# Altium PCB JacDacRHTemp_Panel.PcbDoc (part 2 of 2)
Units mm, origin at the board's own origin, x right, y up, seen from the top; angles counter-clockwise.
Board outline 188.07 x 95 mm, 2 copper layers (Top Layer, Bottom Layer); 1 components, 34 nets, 50 pads, 167 vias.
Unrouted connection lines stored in the file: 5.
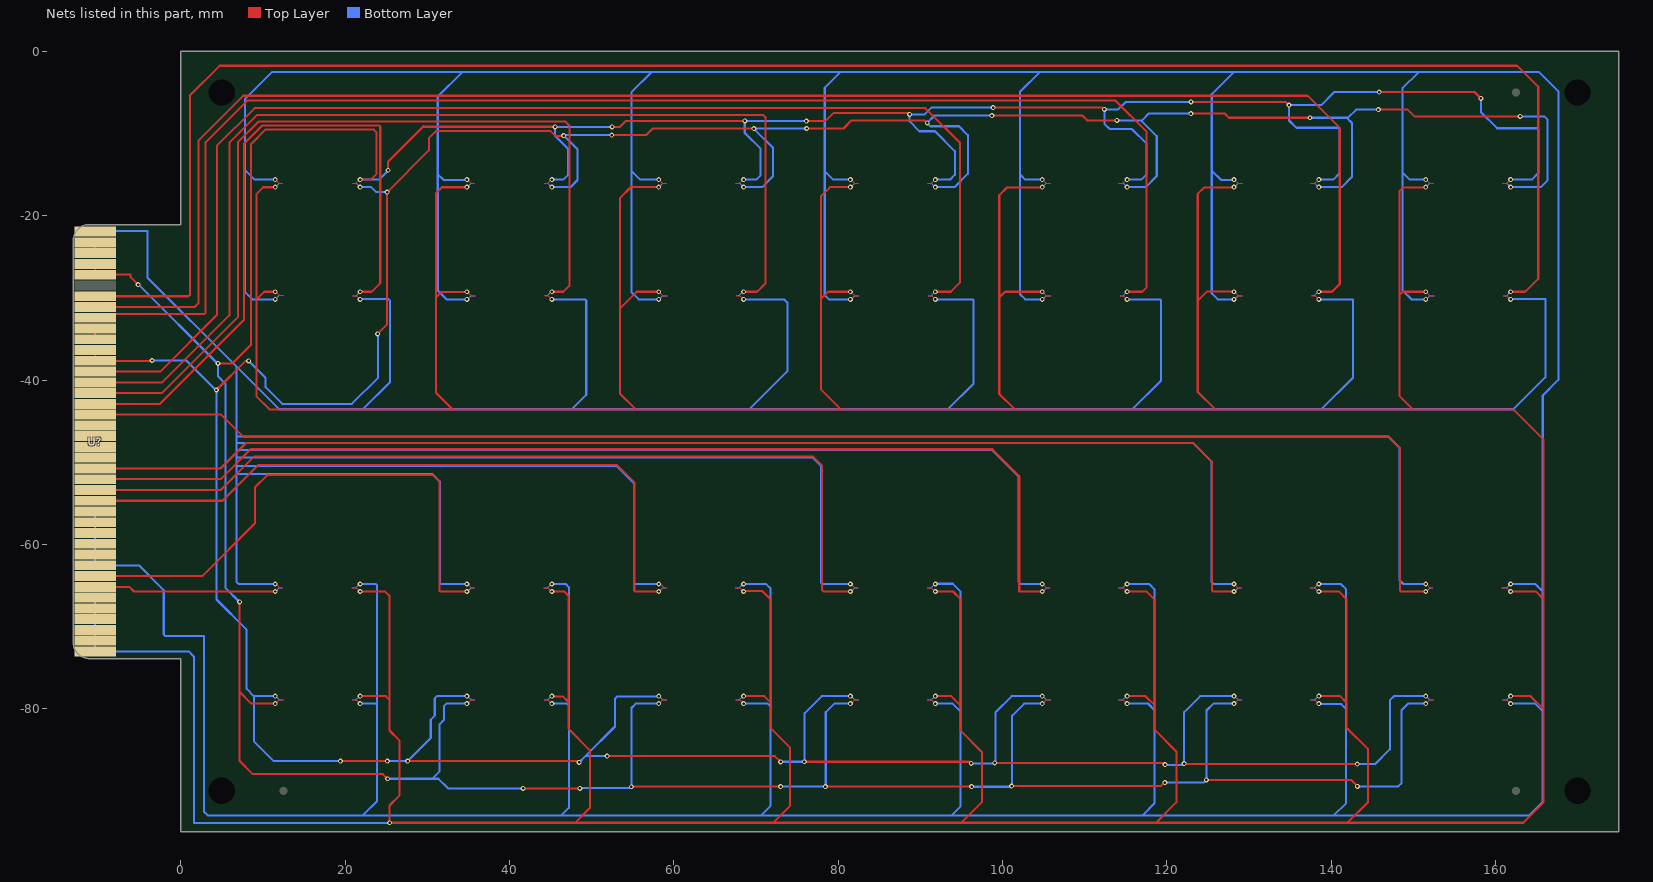
[diagram p2: the nets of this part, all layers, seen from the top]

## Part data
U?: "Microbit edge connector"

## Free pads (board coordinates)
  round 1.524 hole 3.2: 2(5,-90) 2(5,-5) 2(170,-5) 3(170,-90)
  round 1 all layers, no hole mask+1: 4(12.5,-90) 4(162.5,-90) 4(162.5,-5)

## Via types
v1: diameter 0.6, hole 0.3, Top Layer to Bottom Layer, 167 vias

## Nets (pads, with @x,y where several pads share a name; then routed paths per layer and width w, separated by ;. In a path a pad name is that pad's centre, name@x,y a point inside that pad or via, vN(x,y) a via of type N, cw(c..) or ccw(c..) an arc to the next point about the centre after c; other vN are vias at no path point)
3V3: U?.3v3_1 U?.3v3_2 U?.3v3_3 U?.3v3_4 U?.3v3_5 U?.3v3_6 | length 948.2
  Top Layer w0.15: v1@11.565,-15.61 12.021,-16.067 12.413,-16.067 ; 20.892,-78.931 21.351,-78.931 v1@21.809,-79.39 ; v1@34.887,-15.611 35.345,-16.068 35.774,-16.068 ; 44.259,-78.929 44.672,-78.929 v1@45.132,-79.39 ; v1@58.227,-15.611 58.682,-16.066 59.125,-16.066 ; 67.552,-78.93 68.007,-78.93 v1@68.467,-79.39 ; v1(81.511,-15.611) 81.577,-15.611 82.033,-16.066 82.475,-16.066 ; 90.859,-78.931 91.344,-78.931 v1@91.802,-79.39 ; v1@104.893,-15.611 105.352,-16.07 105.839,-16.07 ; 114.161,-78.929 114.683,-78.929 v1@115.143,-79.39 ; v1@128.234,-15.611 128.691,-16.068 129.189,-16.068 ; 137.547,-78.928 138.021,-78.928 v1@138.482,-79.39 ; v1@151.581,-15.611 152.033,-16.063 152.507,-16.063 ; 160.896,-78.929 161.357,-78.929 v1@161.817,-79.39
  Top Layer w0.254: v1(11.5,-15.61) v1@11.565,-15.61 ; v1@21.809,-79.39 v1(21.837,-79.39) ; v1(34.837,-30.176) v1@34.877,-30.176 ; v1@45.116,-64.825 v1(45.174,-64.825) ; v1@45.132,-79.39 v1(45.174,-79.39) ; v1(58.174,-30.176) v1@58.217,-30.176 ; v1(58.174,-15.611) v1@58.227,-15.611 ; v1(81.511,-30.176) v1@81.551,-30.176 ; v1(104.848,-30.176) v1@104.888,-30.176 ; v1(104.848,-15.611) v1@104.893,-15.611 ; v1(128.185,-30.176) v1@128.23,-30.176 ; v1(128.185,-15.611) v1@128.234,-15.611 ; v1(151.522,-30.176) v1@151.574,-30.176 ; v1(151.522,-15.611) v1@151.581,-15.611
  Bottom Layer w0.15: v1@11.539,-30.175 12.001,-29.713 12.491,-29.713 ; 20.839,-65.281 21.331,-65.281 v1@21.787,-64.825 ; v1(34.837,-15.611) v1@34.887,-15.611 ; v1@34.877,-30.176 35.339,-29.714 35.868,-29.714 ; 44.183,-65.277 44.664,-65.277 v1@45.116,-64.825 ; v1@58.217,-30.176 58.678,-29.716 59.229,-29.716 ; 67.511,-65.282 67.994,-65.282 v1@68.451,-64.825 ; v1@81.551,-30.176 82.013,-29.714 82.519,-29.714 ; 90.842,-65.28 91.341,-65.28 v1@91.796,-64.825 ; v1@104.888,-30.176 105.35,-29.714 105.896,-29.714 ; 114.139,-65.277 114.675,-65.277 v1@115.127,-64.825 ; v1@128.23,-30.176 128.689,-29.716 129.193,-29.716 ; 137.485,-65.279 138.014,-65.279 v1@138.468,-64.825 ; v1@151.574,-30.176 152.03,-29.72 152.579,-29.72 ; 160.802,-65.283 161.355,-65.283 v1@161.813,-64.825
  Bottom Layer w0.254: U?.3v3_1@-10.414,-56.001 U?.3v3_2@-10.414,-57.311 U?.3v3_3@-10.414,-58.621 U?.3v3_4@-10.414,-59.931 U?.3v3_5@-10.414,-61.241 U?.3v3_6@-10.414,-62.551 -5.081,-62.551 -2.067,-65.565 -2.067,-70.993 -1.918,-71.142 2.81,-71.142 2.81,-92.516 3.284,-92.99 22.167,-92.99 ; v1(11.5,-15.61) 9.004,-15.61 7.803,-14.409 ; v1@11.539,-30.175 v1(11.5,-30.175) 8.733,-30.175 7.803,-29.245 7.803,-14.409 ; v1@21.787,-64.825 v1(21.837,-64.825) 23.744,-64.825 23.893,-64.973 23.893,-79.51 ; v1(21.837,-79.39) 23.773,-79.39 23.893,-79.51 ; v1(34.837,-30.176) 32.347,-30.176 31.282,-29.111 31.282,-14.944 ; v1(34.837,-15.611) 34.791,-15.657 31.995,-15.657 31.282,-14.944 ; v1(45.174,-79.39) 46.974,-79.39 47.24,-79.656 ; v1(45.174,-64.825) 46.866,-64.825 47.24,-65.199 47.24,-79.656 ; v1(58.174,-30.176) 55.736,-30.176 54.849,-29.289 54.849,-14.542 ; v1(58.174,-15.611) 58.173,-15.612 55.919,-15.612 54.849,-14.542 ; v1@68.451,-64.825 v1(68.511,-64.825) 68.523,-64.836 71.244,-64.836 71.788,-65.38 71.788,-79.749 ; v1@68.467,-79.39 v1(68.511,-79.39) 71.429,-79.39 71.788,-79.749 ; v1(81.511,-30.176) 81.503,-30.184 78.88,-30.184 78.382,-29.686 78.382,-14.59 ; v1(81.511,-15.611) 79.403,-15.611 78.382,-14.59 ; v1@91.796,-64.825 v1(91.848,-64.825) 91.877,-64.796 93.961,-64.796 94.883,-65.718 94.883,-80.33 ; v1@91.802,-79.39 v1(91.848,-79.39) 93.943,-79.39 94.883,-80.33 ; v1(104.848,-30.176) 102.765,-30.176 102.137,-29.548 102.137,-14.985 ; v1(104.848,-15.611) 102.763,-15.611 102.137,-14.985 ; v1@115.127,-64.825 v1(115.185,-64.825) 117.883,-64.825 118.503,-65.445 118.503,-80.161 ; v1@115.143,-79.39 v1(115.185,-79.39) 115.2,-79.375 117.717,-79.375 118.503,-80.161 ; v1(128.185,-30.176) 126.213,-30.176 125.484,-29.447 125.484,-14.519 ; v1(128.185,-15.611) 128.158,-15.638 126.603,-15.638 125.484,-14.519 ; v1@138.468,-64.825 v1(138.522,-64.825) 141.187,-64.825 141.842,-65.48 141.842,-80.031 ; v1@138.482,-79.39 v1(138.522,-79.39) 138.58,-79.447 141.258,-79.447 141.842,-80.031 ; v1(151.522,-30.176) 149.792,-30.176 148.685,-29.069 148.685,-14.72 ; v1(151.522,-15.611) 149.576,-15.611 148.685,-14.72 ; v1@161.813,-64.825 v1(161.859,-64.825) 164.843,-64.825 165.763,-65.745 ; v1@161.817,-79.39 v1(161.859,-79.39) 164.858,-79.39 165.763,-80.295 ; 7.803,-14.409 7.803,-5.811 11.09,-2.524 34.257,-2.524 ; 22.167,-92.99 46.328,-92.99 ; 22.167,-92.99 23.893,-91.264 23.893,-79.51 ; 31.282,-14.944 31.282,-5.499 34.257,-2.524 ; 34.257,-2.524 57.289,-2.524 ; 46.328,-92.99 70.633,-92.99 ; 46.328,-92.99 47.24,-92.078 47.24,-79.656 ; 54.849,-14.542 54.849,-4.964 57.289,-2.524 ; 57.289,-2.524 80.273,-2.524 ; 70.633,-92.99 93.818,-92.99 ; 70.633,-92.99 71.788,-91.835 71.788,-79.749 ; 78.382,-14.59 78.382,-4.415 80.273,-2.524 ; 80.273,-2.524 104.545,-2.524 ; 93.818,-92.99 117.059,-92.99 ; 93.818,-92.99 94.883,-91.925 94.883,-80.33 ; 102.137,-14.985 102.137,-4.932 104.545,-2.524 ; 104.545,-2.524 128.163,-2.524 ; 117.059,-92.99 140.344,-92.99 ; 117.059,-92.99 118.503,-91.546 118.503,-80.161 ; 125.484,-14.519 125.484,-5.203 128.163,-2.524 ; 128.163,-2.524 150.662,-2.524 ; 140.344,-92.99 164.135,-92.99 165.763,-91.362 165.763,-80.295 ; 140.344,-92.99 141.842,-91.492 141.842,-80.031 ; 148.685,-14.72 148.685,-4.501 150.662,-2.524 ; 150.662,-2.524 165.318,-2.524 167.664,-4.87 167.664,-39.981 165.763,-41.882 165.763,-65.745 ; 165.763,-80.295 165.763,-65.745
GND: U?.GND_1 U?.GND_2 U?.GND_3 U?.GND_4 U?.GND_5 U?.GND_6 | length 912.1
  Top Layer w0.15: v1@11.559,-29.26 12.011,-29.713 12.491,-29.713 ; 20.851,-65.282 21.332,-65.282 v1@21.789,-65.74 ; v1@34.894,-29.261 35.347,-29.714 35.868,-29.714 ; 44.183,-65.277 44.674,-65.277 v1@45.136,-65.74 ; v1@58.211,-29.261 58.666,-29.716 59.229,-29.716 ; 67.518,-65.281 68.017,-65.281 v1@68.475,-65.74 ; v1@81.568,-29.261 82.021,-29.714 82.519,-29.714 ; 90.842,-65.28 91.345,-65.28 v1@91.804,-65.74 ; v1@104.905,-29.261 105.358,-29.714 105.896,-29.714 ; 114.139,-65.277 114.685,-65.277 v1@115.147,-65.74 ; v1(128.185,-29.261) 128.244,-29.261 128.7,-29.716 129.193,-29.716 ; 137.485,-65.279 138.02,-65.279 v1@138.48,-65.74 ; v1@151.567,-29.261 152.026,-29.72 152.579,-29.72 ; 160.802,-65.283 161.353,-65.283 v1@161.809,-65.74
  Top Layer w0.254: v1(11.5,-29.26) 10.18,-29.26 9.202,-30.238 ; v1(11.5,-16.526) 11.492,-16.535 10.045,-16.535 9.202,-17.378 9.202,-30.238 ; v1@21.789,-65.74 v1(21.837,-65.74) 21.846,-65.748 24.883,-65.748 25.412,-66.277 25.412,-78.918 ; v1(21.837,-78.474) 24.968,-78.474 25.412,-78.918 ; v1(34.837,-16.527) 34.827,-16.537 31.8,-16.537 31.091,-17.246 31.091,-29.923 ; v1@34.894,-29.261 v1(34.837,-29.261) 34.805,-29.293 31.721,-29.293 31.091,-29.923 ; v1@45.136,-65.74 v1(45.174,-65.74) 46.678,-65.74 47.191,-66.253 47.191,-79.184 ; v1(45.174,-78.474) 45.202,-78.501 46.508,-78.501 47.191,-79.184 ; v1(58.174,-16.527) 54.938,-16.527 54.865,-16.454 53.449,-17.87 53.449,-31.304 ; v1@58.211,-29.261 v1(58.174,-29.261) 55.492,-29.261 53.449,-31.304 ; v1(68.511,-78.474) 71.037,-78.474 71.828,-79.265 ; v1(68.511,-65.74) 68.558,-65.693 70.811,-65.693 71.828,-66.71 71.828,-79.265 ; v1(81.511,-16.527) 79.042,-16.527 77.913,-17.656 77.913,-30.144 ; v1@81.568,-29.261 v1(81.511,-29.261) 78.796,-29.261 77.913,-30.144 ; v1(91.848,-78.474) 91.851,-78.476 93.758,-78.476 94.935,-79.653 ; v1(91.848,-65.74) 93.991,-65.74 94.935,-66.684 94.935,-79.653 ; v1(104.848,-16.527) 104.808,-16.567 100.561,-16.567 99.614,-17.514 99.614,-29.958 ; v1@104.905,-29.261 v1(104.848,-29.261) 104.841,-29.253 100.319,-29.253 99.614,-29.958 ; v1(115.185,-78.474) 115.187,-78.475 117.422,-78.475 118.521,-79.574 ; v1(115.185,-65.74) 115.203,-65.722 117.514,-65.722 118.521,-66.729 118.521,-79.574 ; v1(128.185,-29.261) 128.136,-29.211 124.923,-29.211 123.778,-30.356 ; v1(128.185,-16.527) 128.125,-16.587 124.542,-16.587 123.778,-17.351 123.778,-30.356 ; v1(138.522,-78.474) 138.525,-78.476 141.097,-78.476 141.873,-79.252 ; v1(138.522,-65.74) 138.547,-65.715 140.928,-65.715 141.873,-66.66 141.873,-79.252 ; v1(151.522,-16.527) 151.501,-16.548 148.804,-16.548 148.308,-17.044 148.308,-29.697 ; v1@151.567,-29.261 v1(151.522,-29.261) 148.744,-29.261 148.308,-29.697 ; v1(161.859,-78.474) 161.863,-78.47 164.272,-78.47 165.879,-80.077 ; v1(161.859,-65.74) 161.881,-65.718 164.889,-65.718 165.879,-66.708 ; 9.202,-30.238 9.202,-41.97 10.8,-43.568 33.083,-43.568 ; 25.412,-78.918 25.412,-82.659 26.609,-83.856 26.609,-90.588 25.412,-91.785 v1(25.412,-93.882) 48.009,-93.882 ; 31.091,-29.923 31.091,-41.576 33.083,-43.568 ; 33.083,-43.568 55.37,-43.568 ; 47.191,-79.184 47.191,-82.431 49.798,-85.038 49.798,-92.093 48.009,-93.882 ; 48.009,-93.882 72.117,-93.882 ; 53.449,-31.304 53.449,-41.647 55.37,-43.568 ; 55.37,-43.568 80.349,-43.568 ; 71.828,-79.265 71.828,-82.385 74.142,-84.699 74.142,-91.857 72.117,-93.882 ; 72.117,-93.882 94.998,-93.882 ; 77.913,-30.144 77.913,-41.132 80.349,-43.568 ; 80.349,-43.568 101.485,-43.568 ; 94.935,-79.653 94.935,-82.701 97.507,-85.273 97.507,-91.373 94.998,-93.882 ; 94.998,-93.882 118.692,-93.882 ; 99.614,-29.958 99.614,-41.697 101.485,-43.568 ; 101.485,-43.568 125.893,-43.568 ; 118.521,-79.574 118.521,-82.571 121.165,-85.215 121.165,-91.409 118.692,-93.882 ; 118.692,-93.882 141.982,-93.882 ; 123.778,-30.356 123.778,-41.453 125.893,-43.568 ; 125.893,-43.568 149.955,-43.568 ; 141.873,-79.252 141.873,-82.299 144.509,-84.935 144.509,-91.355 141.982,-93.882 ; 141.982,-93.882 163.387,-93.882 165.879,-91.39 165.879,-80.077 ; 148.308,-29.697 148.308,-41.921 149.955,-43.568 ; 149.955,-43.568 162.179,-43.568 165.879,-47.268 165.879,-66.708 ; 165.879,-80.077 165.879,-66.708
  Bottom Layer w0.15: v1@11.531,-16.526 11.99,-16.067 12.413,-16.067 ; 20.941,-78.933 21.321,-78.933 v1@21.781,-78.474 ; v1@34.884,-16.527 35.342,-16.068 35.774,-16.068 ; 44.256,-78.93 44.668,-78.93 v1@45.124,-78.474 ; v1@58.216,-16.527 58.677,-16.066 59.125,-16.066 ; 67.552,-78.93 67.981,-78.93 68.438,-78.474 v1(68.511,-78.474) ; v1@81.553,-16.527 82.014,-16.066 82.475,-16.066 ; 90.859,-78.931 91.343,-78.931 v1@91.8,-78.474 ; v1@104.898,-16.527 105.355,-16.07 105.839,-16.07 ; 114.161,-78.929 114.678,-78.929 v1@115.133,-78.474 ; v1@128.231,-16.527 128.69,-16.068 129.189,-16.068 ; 137.547,-78.928 138.014,-78.928 v1@138.468,-78.474 ; v1@151.558,-16.527 152.022,-16.063 152.507,-16.063 ; 160.896,-78.929 161.352,-78.929 v1@161.807,-78.474
  Bottom Layer w0.254: U?.GND_1@-10.414,-66.481 U?.GND_2@-10.414,-67.791 U?.GND_3@-10.414,-69.101 U?.GND_4@-10.414,-70.411 U?.GND_5@-10.414,-71.721 U?.GND_6@-10.414,-73.031 0.981,-73.031 1.597,-73.647 1.597,-93.883 1.647,-93.933 25.361,-93.933 v1(25.412,-93.882) ; v1(11.5,-29.26) v1@11.559,-29.26 ; v1@21.781,-78.474 v1(21.837,-78.474) ; v1@45.124,-78.474 v1(45.174,-78.474) ; v1@68.475,-65.74 v1(68.511,-65.74) ; v1@91.8,-78.474 v1(91.848,-78.474) ; v1@91.804,-65.74 v1(91.848,-65.74) ; v1@115.133,-78.474 v1(115.185,-78.474) ; v1@115.147,-65.74 v1(115.185,-65.74) ; v1@138.468,-78.474 v1(138.522,-78.474) ; v1@138.48,-65.74 v1(138.522,-65.74) ; v1@161.807,-78.474 v1(161.859,-78.474) ; v1@161.809,-65.74 v1(161.859,-65.74)
JD_DATA: U?.P3 | length 970.6
  Top Layer w0.15: v1(11.5,-64.824) 11.574,-64.824 12.031,-65.281 12.445,-65.281 ; 20.929,-29.718 21.38,-29.718 v1(21.837,-30.176) ; v1(34.837,-64.824) 34.92,-64.824 35.379,-65.283 35.79,-65.283 ; 44.287,-29.717 44.715,-29.717 v1(45.174,-30.176) ; v1(58.174,-64.824) 58.26,-64.91 58.5,-64.91 58.873,-65.282 59.19,-65.282 ; 67.615,-29.718 68.053,-29.718 v1(68.511,-30.176) ; v1@81.557,-64.824 82.016,-65.283 82.433,-65.283 ; 90.953,-29.718 91.39,-29.718 v1(91.848,-30.176) ; v1@104.908,-64.824 105.364,-65.281 105.797,-65.281 ; 114.295,-29.719 114.728,-29.719 v1(115.185,-30.176) ; v1(128.185,-64.824) 128.643,-65.281 129.07,-65.281 ; 137.607,-29.717 138.064,-29.717 v1(138.522,-30.176) ; v1@151.58,-64.824 152.04,-65.284 152.405,-65.284 ; 160.96,-29.72 161.352,-29.72 v1@161.809,-30.176
  Top Layer w0.254: v1(81.511,-64.824) v1@81.557,-64.824 ; v1(104.848,-64.824) v1@104.908,-64.824 ; v1(151.522,-64.824) v1@151.58,-64.824 ; v1@161.809,-30.176 v1(161.859,-30.176)
  Bottom Layer w0.254: U?.P3@-10.414,-21.941 -10.32,-21.847 -4.056,-21.847 -4.056,-27.521 6.763,-38.34 ; v1(11.5,-64.824) 7.046,-64.824 6.763,-64.541 6.763,-51.441 ; v1(21.837,-30.176) 21.865,-30.148 25.267,-30.148 25.464,-30.345 25.464,-40.27 22.176,-43.558 ; v1(34.837,-64.824) 31.688,-64.824 31.539,-64.675 31.539,-52.377 30.603,-51.441 6.763,-51.441 ; v1(45.174,-30.176) 45.195,-30.197 49.201,-30.197 49.35,-30.346 49.35,-41.809 47.601,-43.558 ; v1(58.174,-64.824) 55.304,-64.824 55.155,-64.675 55.155,-52.565 53.07,-50.48 6.763,-50.48 ; v1(68.511,-30.176) 73.414,-30.176 73.832,-30.594 73.832,-38.93 69.204,-43.558 ; v1(81.511,-64.824) 78.101,-64.824 77.952,-64.675 77.952,-50.515 76.857,-49.42 6.763,-49.42 ; v1(91.848,-30.176) 96.359,-30.176 96.499,-30.316 96.499,-40.43 93.371,-43.558 ; v1(104.848,-64.824) 102.25,-64.824 101.973,-64.547 101.973,-51.782 98.685,-48.494 6.763,-48.494 ; v1(115.185,-30.176) 119.205,-30.176 119.322,-30.293 119.322,-40.054 115.818,-43.558 ; v1(128.185,-64.824) 125.733,-64.824 125.465,-64.556 125.465,-49.934 123.175,-47.644 6.763,-47.644 ; v1(138.522,-30.176) 142.602,-30.176 142.676,-30.25 142.676,-39.71 138.828,-43.558 ; v1(151.522,-64.824) 148.814,-64.824 148.361,-64.371 148.361,-48.266 146.991,-46.896 6.763,-46.896 ; v1(161.859,-30.176) 161.872,-30.164 166.073,-30.164 166.073,-39.666 162.181,-43.558 138.828,-43.558 ; 6.763,-51.441 6.763,-50.48 ; 6.763,-50.48 6.763,-49.42 ; 6.763,-49.42 6.763,-48.494 ; 6.763,-48.494 6.763,-47.644 ; 6.763,-47.644 6.763,-46.896 ; 6.763,-46.896 6.763,-38.34 ; 6.763,-38.34 11.981,-43.558 22.176,-43.558 ; 22.176,-43.558 47.601,-43.558 ; 47.601,-43.558 69.204,-43.558 ; 69.204,-43.558 93.371,-43.558 ; 93.371,-43.558 115.818,-43.558 ; 115.818,-43.558 138.828,-43.558
JD_PWR: 
JD_RGB_B: 
JD_RGB_G: 
JD_RGB_R: 
JD_STATUS: 
NetC1_2: 
NetD3_1: 
NetD4_2: 
NetD4_3: 
NetD4_4: 
NetD5_1: 
NetU?_P2_1: U?.P2_1 U?.P2_2 U?.P2_3 U?.P2_4
nRESET: 
nRESET1: U?.P5 | length 231
  Top Layer w0.254: U?.P5@-10.414,-29.801 0.967,-29.801 1.116,-29.652 1.116,-5.371 4.739,-1.748 162.653,-1.748 165.211,-4.306 165.211,-27.671 163.621,-29.261 v1(161.859,-29.261)
  Bottom Layer w0.15: 160.985,-29.717 161.353,-29.717 v1@161.809,-29.261
  Bottom Layer w0.254: v1@161.809,-29.261 v1(161.859,-29.261)
nRESET2: U?.P6 | length 198.3
  Top Layer w0.254: U?.P6@-10.414,-31.111 1.705,-31.111 2.151,-30.665 2.151,-10.864 7.608,-5.407 137.151,-5.407 141.054,-9.31 141.054,-28.317 140.11,-29.261 v1(138.522,-29.261)
  Bottom Layer w0.15: 137.652,-29.705 138.004,-29.705 v1@138.448,-29.261
  Bottom Layer w0.254: v1@138.448,-29.261 v1(138.522,-29.261)
nRESET3: U?.P7 | length 175.2
  Top Layer w0.254: U?.P7@-10.414,-32.421 -9.947,-31.954 2.891,-31.954 3.04,-31.805 3.04,-11.05 8.084,-6.006 113.761,-6.006 117.559,-9.804 117.559,-28.707 117.005,-29.261 v1(115.185,-29.261)
  Bottom Layer w0.15: 114.314,-29.725 114.687,-29.725 v1@115.151,-29.261
  Bottom Layer w0.254: v1@115.151,-29.261 v1(115.185,-29.261)
nRESET4: U?.P8 | length 153.9
  Top Layer w0.254: U?.P8@-10.414,-38.971 -2.482,-38.971 4.401,-32.088 4.401,-11.492 8.991,-6.902 90.614,-6.902 94.86,-11.148 94.86,-28.116 93.715,-29.261 v1(91.848,-29.261)
  Bottom Layer w0.15: 90.98,-29.716 91.341,-29.716 v1@91.796,-29.261
  Bottom Layer w0.254: v1@91.796,-29.261 v1(91.848,-29.261)
nRESET5: U?.P9 | length 131.8
  Top Layer w0.254: U?.P9@-10.414,-40.281 -2.233,-40.281 5.919,-32.129 5.919,-11.103 9.267,-7.755 70.898,-7.755 71.169,-8.026 71.169,-28.237 70.145,-29.261 v1(68.511,-29.261)
  Bottom Layer w0.15: 67.645,-29.698 67.986,-29.698 v1@68.423,-29.261
  Bottom Layer w0.254: v1@68.423,-29.261 v1(68.511,-29.261)
nRESET6: U?.P10 | length 107.1
  Top Layer w0.254: U?.P10@-10.414,-41.591 -2.299,-41.591 6.952,-32.34 6.952,-11.076 9.485,-8.543 46.818,-8.543 47.304,-9.029 47.304,-28.527 46.57,-29.261 v1(45.174,-29.261)
  Bottom Layer w0.15: 44.302,-29.699 44.305,-29.702 44.653,-29.702 v1@45.094,-29.261
  Bottom Layer w0.254: v1@45.094,-29.261 v1(45.174,-29.261)
nRESET7: U?.P11 | length 84.4
  Top Layer w0.254: U?.P11@-10.414,-42.901 -2.526,-42.901 7.707,-32.668 7.707,-11.245 9.948,-9.004 24.159,-9.004 24.282,-9.127 24.282,-28.211 23.233,-29.26 v1(21.837,-29.26)
  Bottom Layer w0.15: 20.961,-29.725 21.339,-29.725 v1@21.804,-29.26
  Bottom Layer w0.254: v1@21.804,-29.26 v1(21.837,-29.26)
nRESET8: U?.P12 | length 182
  Top Layer w0.254: U?.P12@-10.414,-44.211 4.921,-44.211 7.614,-46.904 147.004,-46.904 148.366,-48.266 148.366,-65.59 148.515,-65.74 v1(151.522,-65.74)
  Bottom Layer w0.15: v1@151.6,-65.74 152.043,-65.297 152.386,-65.297
  Bottom Layer w0.254: v1(151.522,-65.74) v1@151.6,-65.74
nRESET9: U?.P13 | length 157.6
  Top Layer w0.254: U?.P13@-10.414,-50.761 4.846,-50.761 7.949,-47.658 123.215,-47.658 125.494,-49.937 125.494,-65.571 125.662,-65.74 v1(128.185,-65.74)
  Bottom Layer w0.15: v1@128.279,-65.74 128.711,-65.308 129.053,-65.308
  Bottom Layer w0.254: v1(128.185,-65.74) v1@128.279,-65.74
nRESET10: U?.P14 | length 133.2
  Top Layer w0.254: U?.P14@-10.414,-52.071 4.852,-52.071 8.494,-48.429 98.769,-48.429 102.048,-51.708 102.048,-65.738 104.847,-65.738 v1(104.848,-65.74)
  Bottom Layer w0.15: v1@104.932,-65.74 105.372,-65.3 105.714,-65.3
  Bottom Layer w0.254: v1(104.848,-65.74) v1@104.932,-65.74
nRESET11: U?.P15 | length 110.3
  Top Layer w0.254: U?.P15@-10.414,-53.381 4.849,-53.381 8.907,-49.323 76.952,-49.323 78.033,-50.404 78.033,-65.531 78.241,-65.74 v1(81.511,-65.74)
  Bottom Layer w0.15: v1@81.593,-65.74 82.034,-65.299 82.381,-65.299
  Bottom Layer w0.254: v1(81.511,-65.74) v1@81.593,-65.74
nRESET12: U?.P16 | length 85.5
  Top Layer w0.254: U?.P16@-10.414,-54.691 5.089,-54.691 9.439,-50.341 53.071,-50.341 55.192,-52.462 55.192,-65.591 55.341,-65.74 v1(58.174,-65.74)
  Bottom Layer w0.15: v1@58.248,-65.74 58.693,-65.295 59.032,-65.295
  Bottom Layer w0.254: v1(58.174,-65.74) v1@58.248,-65.74
nRESET13: U?.P19 | length 67.6
  Top Layer w0.254: U?.P19@-10.414,-63.861 2.605,-63.861 9.039,-57.427 9.039,-53.057 10.516,-51.58 30.742,-51.58 31.495,-52.333 31.495,-65.658 31.576,-65.74 v1(34.837,-65.74)
  Bottom Layer w0.15: v1@34.895,-65.74 35.348,-65.287 35.697,-65.287
  Bottom Layer w0.254: v1(34.837,-65.74) v1@34.895,-65.74
nRESET14: U?.P20 | length 23.2
  Top Layer w0.254: U?.P20@-10.414,-65.171 -6.253,-65.171 -5.684,-65.74 v1(11.5,-65.74)
  Bottom Layer w0.15: v1@11.56,-65.74 12.012,-65.288 12.356,-65.288
  Bottom Layer w0.254: v1(11.5,-65.74) v1@11.56,-65.74
SHTC3_SCL: 
SHTC3_SDA: 
SWCLK: U?.P0_1 U?.P0_2 U?.P0_3 U?.P0_4 | length 588.2
  Top Layer w0.15: v1(11.5,-79.389) 11.533,-79.389 11.989,-78.933 12.481,-78.933 ; 20.916,-16.068 21.317,-16.068 21.774,-15.611 v1(21.837,-15.611) ; v1(34.837,-79.389) 34.889,-79.389 35.347,-78.931 35.789,-78.931 ; 44.236,-16.068 44.66,-16.068 v1@45.117,-15.611 ; v1@58.219,-79.389 58.677,-78.932 59.14,-78.932 ; 67.528,-16.067 67.998,-16.067 68.454,-15.611 v1(68.511,-15.611) ; v1@81.542,-79.389 82.008,-78.923 82.495,-78.923 ; 90.892,-16.068 91.342,-16.068 91.799,-15.611 v1(91.848,-15.611) ; v1(104.848,-79.389) 104.901,-79.389 105.358,-78.932 105.862,-78.932 ; 114.187,-16.065 114.676,-16.065 v1@115.13,-15.611 ; v1(128.185,-79.389) 128.229,-79.389 128.686,-78.932 129.108,-78.932 ; 137.535,-16.068 138.016,-16.068 v1@138.473,-15.611 ; v1(151.522,-79.389) 151.577,-79.389 152.034,-78.932 152.447,-78.932 ; 160.859,-16.069 161.354,-16.069 v1@161.812,-15.611
  Top Layer w0.254: U?.P0_3@-10.414,-25.871 U?.P0_4@-10.414,-27.181 -6.091,-27.181 -6.091,-27.483 v1(-5.176,-28.398) ; U?.P0_2@-10.414,-24.561 U?.P0_1@-10.414,-23.251 ; v1(4.538,-37.982) 6.278,-37.982 8.547,-35.713 8.547,-11.288 10.306,-9.529 23.494,-9.529 23.814,-9.849 23.814,-14.94 23.143,-15.611 v1(21.837,-15.611) ; v1(7.16,-67.013) 7.16,-77.943 ; v1(11.5,-79.389) 8.606,-79.389 7.16,-77.943 ; v1(25.172,-88.523) 24.61,-87.961 8.772,-87.961 7.16,-86.349 7.16,-77.943 ; v1(25.251,-14.471) 25.251,-13.401 29.547,-9.105 29.623,-9.181 v1(45.572,-9.181) ; v1(41.682,-89.71) 41.695,-89.697 v1(48.575,-89.697) ; v1@45.117,-15.611 v1(45.174,-15.611) ; v1(52.497,-9.186) 53.462,-9.186 54.189,-8.459 v1(68.649,-8.459) ; v1(54.854,-89.498) 54.876,-89.477 v1(73.005,-89.477) ; v1(58.174,-79.389) v1@58.219,-79.389 ; v1(76.137,-8.498) 78.459,-8.498 79.471,-7.486 88.526,-7.486 v1(88.702,-7.662) ; v1(78.464,-89.477) v1(96.262,-89.477) ; v1(81.511,-79.389) v1@81.542,-79.389 ; v1(98.881,-6.846) 112.197,-6.846 v1(112.415,-7.064) ; v1(101.115,-89.426) 119.263,-89.426 119.701,-88.987 v1(119.787,-88.987) ; v1@115.13,-15.611 v1(115.185,-15.611) ; v1(122.955,-6.16) 134.498,-6.16 v1(134.883,-6.545) ; v1(124.836,-88.67) 142.433,-88.67 v1(143.215,-89.452) ; v1@138.473,-15.611 v1(138.522,-15.611) ; v1(145.861,-4.951) 157.461,-4.951 v1(158.243,-5.733) ; v1@161.812,-15.611 v1(161.859,-15.611)
  Bottom Layer w0.254: v1(-5.176,-28.398) -5.111,-28.398 4.473,-37.982 v1(4.538,-37.982) 4.538,-39.55 5.435,-40.447 5.435,-65.288 v1(7.16,-67.013) ; v1(21.837,-15.611) 24.137,-15.611 25.251,-14.497 v1(25.251,-14.471) ; v1(25.172,-88.523) 30.6,-88.523 ; v1(34.837,-79.389) 32.321,-79.389 32.023,-79.687 32.023,-81.383 31.514,-81.892 31.514,-87.609 30.6,-88.523 ; v1(41.682,-89.71) 32.549,-89.71 31.362,-88.523 30.6,-88.523 ; v1(45.174,-15.611) 46.552,-15.611 47.154,-15.009 47.154,-11.891 45.572,-10.309 v1(45.572,-9.181) 45.577,-9.186 v1(52.497,-9.186) ; v1(48.575,-89.697) 48.625,-89.647 54.705,-89.647 v1(54.854,-89.498) 54.854,-79.913 55.378,-79.389 v1(58.174,-79.389) ; v1(68.511,-15.611) 70.033,-15.611 70.569,-15.075 70.569,-11.853 68.649,-9.933 v1(68.649,-8.459) 68.688,-8.498 v1(76.137,-8.498) ; v1(73.005,-89.477) v1(78.464,-89.477) 78.505,-89.436 78.505,-80.434 79.55,-79.389 v1(81.511,-79.389) ; v1(91.848,-15.611) 93.625,-15.611 94.216,-15.02 94.216,-12.14 91.795,-9.719 89.902,-9.719 88.702,-8.519 v1(88.702,-7.662) 90.533,-7.662 91.349,-6.846 v1(98.881,-6.846) ; v1(96.262,-89.477) 96.285,-89.5 101.04,-89.5 v1(101.115,-89.426) 101.189,-89.351 101.189,-80.858 102.658,-79.389 v1(104.848,-79.389) ; v1(115.185,-15.611) 116.89,-15.611 117.547,-14.954 117.547,-11.25 115.834,-9.537 115.76,-9.463 113.09,-9.463 112.415,-8.788 v1(112.415,-7.064) 114.089,-7.064 114.993,-6.16 v1(122.955,-6.16) ; v1(119.787,-88.987) 124.519,-88.987 v1(124.836,-88.67) 124.836,-80.225 125.672,-79.389 v1(128.185,-79.389) ; v1(138.522,-15.611) 140.244,-15.611 141.022,-14.833 141.022,-9.426 140.896,-9.3 135.775,-9.3 134.883,-8.408 v1(134.883,-6.545) 138.809,-6.545 140.403,-4.951 v1(145.861,-4.951) ; v1(143.215,-89.452) 148.184,-89.452 148.596,-89.04 148.596,-80.164 149.371,-79.389 v1(151.522,-79.389) ; v1(158.243,-5.733) 158.243,-7.391 160.21,-9.358 165.085,-9.358 165.215,-9.488 165.215,-14.804 164.408,-15.611 v1(161.859,-15.611)
SWDIO: U?.P1_1 U?.P1_2 U?.P1_3 U?.P1_4 | length 570.7
  Top Layer w0.254: U?.P1_3@-10.414,-36.351 U?.P1_4@-10.414,-37.661 -3.518,-37.661 v1(-3.483,-37.626) ; U?.P1_2@-10.414,-35.041 U?.P1_1@-10.414,-33.731 ; v1(4.351,-41.214) 7.898,-37.667 v1(8.251,-37.667) ; v1(11.5,-78.474) v1@11.546,-78.474 ; v1(19.434,-86.376) 19.439,-86.371 v1(25.148,-86.371) ; v1@21.791,-16.526 v1(21.837,-16.526) ; v1(23.968,-34.384) 25.127,-33.225 v1(25.127,-17.127) 30.205,-12.049 30.205,-10.592 31.119,-9.678 44.992,-9.678 45.592,-10.278 46.575,-10.278 v1(46.606,-10.247) ; v1(27.625,-86.371) 48.306,-86.371 v1(48.477,-86.542) ; v1@34.813,-78.498 v1(34.837,-78.474) v1@34.886,-78.474 ; v1@45.128,-16.526 v1(45.174,-16.526) ; v1(51.896,-85.781) 72.317,-85.781 v1(73.005,-86.469) ; v1(52.454,-10.202) 56.624,-10.202 57.421,-9.405 v1(69.747,-9.405) ; v1(58.174,-78.474) v1@58.222,-78.474 ; v1@68.466,-16.526 v1(68.511,-16.526) ; v1(75.892,-86.456) 96.005,-86.456 v1(96.213,-86.664) ; v1(76.17,-9.389) 80.659,-9.389 81.642,-8.406 90.521,-8.406 90.813,-8.698 v1(90.858,-8.698) ; v1(81.511,-78.474) v1@81.577,-78.474 ; v1@91.802,-16.526 v1(91.848,-16.526) ; v1(98.716,-7.813) 109.725,-7.813 110.305,-8.393 v1(113.931,-8.393) ; v1(99.066,-86.59) 119.497,-86.59 119.718,-86.811 v1(119.812,-86.811) ; v1(104.848,-78.474) v1@104.895,-78.474 ; v1@115.145,-16.526 v1(115.185,-16.526) ; v1(122.126,-86.688) 122.176,-86.738 v1(143.19,-86.738) ; v1(122.933,-7.569) 127.059,-7.569 127.567,-8.077 137.433,-8.077 v1@137.444,-8.088 ; v1(128.185,-78.474) v1@128.232,-78.474 ; v1@138.476,-16.526 v1(138.522,-16.526) ; v1(145.75,-7.087) 149.312,-7.087 150.139,-7.914 v1(163.015,-7.914) ; v1(151.522,-78.474) v1@151.57,-78.474 ; v1@161.811,-16.526 v1(161.859,-16.526)
  Bottom Layer w0.15: v1@11.546,-78.474 12.005,-78.933 12.481,-78.933 ; 20.916,-16.068 21.333,-16.068 v1@21.791,-16.526 ; v1@34.886,-78.474 35.343,-78.931 35.789,-78.931 ; 44.236,-16.068 44.67,-16.068 v1@45.128,-16.526 ; v1@58.222,-78.474 58.68,-78.932 59.14,-78.932 ; 67.528,-16.067 68.007,-16.067 v1@68.466,-16.526 ; v1@81.577,-78.474 82.026,-78.923 82.495,-78.923 ; 90.892,-16.068 91.344,-16.068 v1@91.802,-16.526 ; v1@104.895,-78.474 105.353,-78.932 105.862,-78.932 ; 114.187,-16.065 114.683,-16.065 v1@115.145,-16.526 ; v1@128.232,-78.474 128.69,-78.932 129.108,-78.932 ; 137.535,-16.068 138.017,-16.068 v1@138.476,-16.526 ; v1@151.57,-78.474 152.028,-78.932 152.447,-78.932 ; 160.859,-16.069 161.353,-16.069 v1@161.811,-16.526
  Bottom Layer w0.254: v1(-3.483,-37.626) 0.674,-37.626 4.262,-41.214 v1(4.351,-41.214) 4.351,-66.718 8.021,-70.388 8.021,-77.595 8.9,-78.474 ; v1(8.251,-37.667) 10.334,-39.75 10.334,-40.886 12.35,-42.902 20.818,-42.902 24.018,-39.702 24.018,-34.434 v1(23.968,-34.384) ; v1(11.5,-78.474) 8.9,-78.474 ; v1(19.434,-86.376) 11.329,-86.376 8.9,-83.947 8.9,-78.474 ; v1(21.837,-16.526) 23.182,-16.526 23.783,-17.127 v1(25.127,-17.127) ; v1(25.148,-86.371) v1(27.625,-86.371) 30.424,-83.572 30.424,-81.334 30.911,-80.847 30.911,-78.74 31.177,-78.474 v1(34.837,-78.474) ; v1(45.174,-16.526) 45.184,-16.517 47.436,-16.517 48.296,-15.657 48.296,-11.906 46.637,-10.247 v1(46.606,-10.247) 46.651,-10.202 v1(52.454,-10.202) ; v1(48.477,-86.542) 49.238,-85.781 ; v1(51.896,-85.781) 49.238,-85.781 ; v1(58.174,-78.474) 58.155,-78.493 53.138,-78.493 52.853,-78.778 52.853,-82.166 49.238,-85.781 ; v1(68.511,-16.526) 68.517,-16.521 70.777,-16.521 72.076,-15.222 72.076,-11.734 v1(69.747,-9.405) 69.763,-9.389 v1(76.17,-9.389) ; v1(73.005,-86.469) 73.011,-86.462 75.885,-86.462 v1(75.892,-86.456) 75.923,-86.425 75.923,-80.56 78.009,-78.474 v1(81.511,-78.474) ; v1(91.848,-16.526) 94.175,-16.526 95.803,-14.898 95.803,-10.207 94.715,-9.119 91.234,-9.119 90.858,-8.743 v1(90.858,-8.698) 91.743,-7.813 v1(98.716,-7.813) ; v1(96.213,-86.664) 98.991,-86.664 v1(99.066,-86.59) 99.14,-86.515 99.14,-80.458 101.124,-78.474 v1(104.848,-78.474) ; v1(113.931,-8.393) 116.843,-8.393 ; v1(115.185,-16.526) 117.428,-16.526 118.785,-15.169 118.785,-10.335 116.843,-8.393 ; v1(119.812,-86.811) 119.838,-86.837 121.977,-86.837 v1(122.126,-86.688) 122.126,-80.422 124.074,-78.474 v1(128.185,-78.474) ; v1(122.933,-7.569) 117.833,-7.569 117.009,-8.393 116.843,-8.393 ; v1(137.439,-8.082) 141.908,-8.082 ; v1(138.522,-16.526) 141.296,-16.526 142.543,-15.279 142.543,-8.717 141.908,-8.082 ; v1(143.19,-86.738) 145.359,-86.738 147.161,-84.936 147.161,-78.979 147.666,-78.474 v1(151.522,-78.474) ; v1(145.75,-7.087) 143.045,-7.087 142.05,-8.082 141.908,-8.082 ; v1(161.859,-16.526) 165.521,-16.526 166.317,-15.73 166.317,-8.269 165.962,-7.914 v1(163.015,-7.914)
pads on no net: U?.P4

## Silkscreen, mask and mechanical layers (free items; w line width, h text height)
Mechanical 1:
  drawing of 870 lines, arcs and shapes, not listed
  text "Route out" at 18.572,-10.754 h1 r180
  text "Route out" at 41.909,-10.754 h1 r180
  text "Route out" at 65.246,-10.754 h1 r180
  text "Route out" at 88.583,-10.754 h1 r180
  text "Route out" at 111.92,-10.754 h1 r180
  text "Route out" at 135.257,-10.754 h1 r180
  text "Route out" at 158.594,-10.754 h1 r180
  text "Route out" at 22.612,-25.343 h1 r90
  text "Route out" at 45.949,-25.344 h1 r90
  text "Route out" at 69.286,-25.344 h1 r90
  text "Route out" at 92.623,-25.344 h1 r90
  text "Route out" at 115.96,-25.344 h1 r90
  text "Route out" at 139.297,-25.344 h1 r90
  text "Route out" at 162.634,-25.344 h1 r90
  text "Route out" at 11.262,-25.418 h1 r90
  text "Route out" at 34.599,-25.419 h1 r90
  text "Route out" at 57.936,-25.419 h1 r90
  text "Route out" at 81.273,-25.419 h1 r90
  text "Route out" at 104.61,-25.419 h1 r90
  text "Route out" at 127.947,-25.419 h1 r90
  text "Route out" at 151.284,-25.419 h1 r90
  text "Route out" at 18.547,-41.079 h1 r180
  text "Route out" at 41.884,-41.079 h1 r180
  text "Route out" at 65.221,-41.079 h1 r180
  text "Route out" at 88.558,-41.079 h1 r180
  text "Route out" at 111.895,-41.079 h1 r180
  text "Route out" at 135.232,-41.079 h1 r180
  text "Route out" at 158.569,-41.079 h1 r180
  text "Route out" at 14.79,-53.921 h1
  text "Route out" at 38.127,-53.921 h1
  text "Route out" at 61.464,-53.921 h1
  text "Route out" at 84.801,-53.921 h1
  text "Route out" at 108.138,-53.921 h1
  text "Route out" at 131.475,-53.921 h1
  text "Route out" at 154.812,-53.921 h1
  text "Route out" at 22.076,-69.582 h1 r270
  text "Route out" at 45.413,-69.582 h1 r270
  text "Route out" at 68.75,-69.582 h1 r270
  text "Route out" at 92.087,-69.582 h1 r270
  text "Route out" at 115.424,-69.582 h1 r270
  text "Route out" at 138.761,-69.582 h1 r270
  text "Route out" at 162.098,-69.582 h1 r270
  text "Route out" at 10.726,-69.657 h1 r270
  text "Route out" at 34.063,-69.657 h1 r270
  text "Route out" at 57.4,-69.657 h1 r270
  text "Route out" at 80.737,-69.657 h1 r270
  text "Route out" at 104.074,-69.657 h1 r270
  text "Route out" at 127.411,-69.657 h1 r270
  text "Route out" at 150.748,-69.657 h1 r270
  text "Route out" at 14.765,-84.246 h1
  text "Route out" at 38.102,-84.246 h1
  text "Route out" at 61.439,-84.246 h1
  text "Route out" at 84.776,-84.246 h1
  text "Route out" at 108.113,-84.246 h1
  text "Route out" at 131.45,-84.246 h1
  text "Route out" at 154.787,-84.246 h1

## Dimensions
33.337,-22.894 to 35.337,-22.894 on Mechanical 13
-13.067,-22.952 to 0,-21.075 on Mechanical 13
0,-21.075 to 10,-10 on Mechanical 13

## Panel: embedded boards
"JacDacRHTemp 18.PcbDoc" at 12.093,-40.317, 1 rows x 7 columns, spacing 33.023 x 23.337, rotation 0
"JacDacRHTemp 18.PcbDoc" at 161.26,-54.682, 1 rows x 7 columns, spacing 33.023 x 23.337, rotation 180